# Altium PCB kapuas.PcbDoc
Units mm, origin at the board's own origin, x right, y up, seen from the top; angles counter-clockwise.
Board outline 100 x 100 mm, 2 copper layers (Top Layer, Bottom Layer); 70 components, 48 nets, 250 pads, 17 vias.
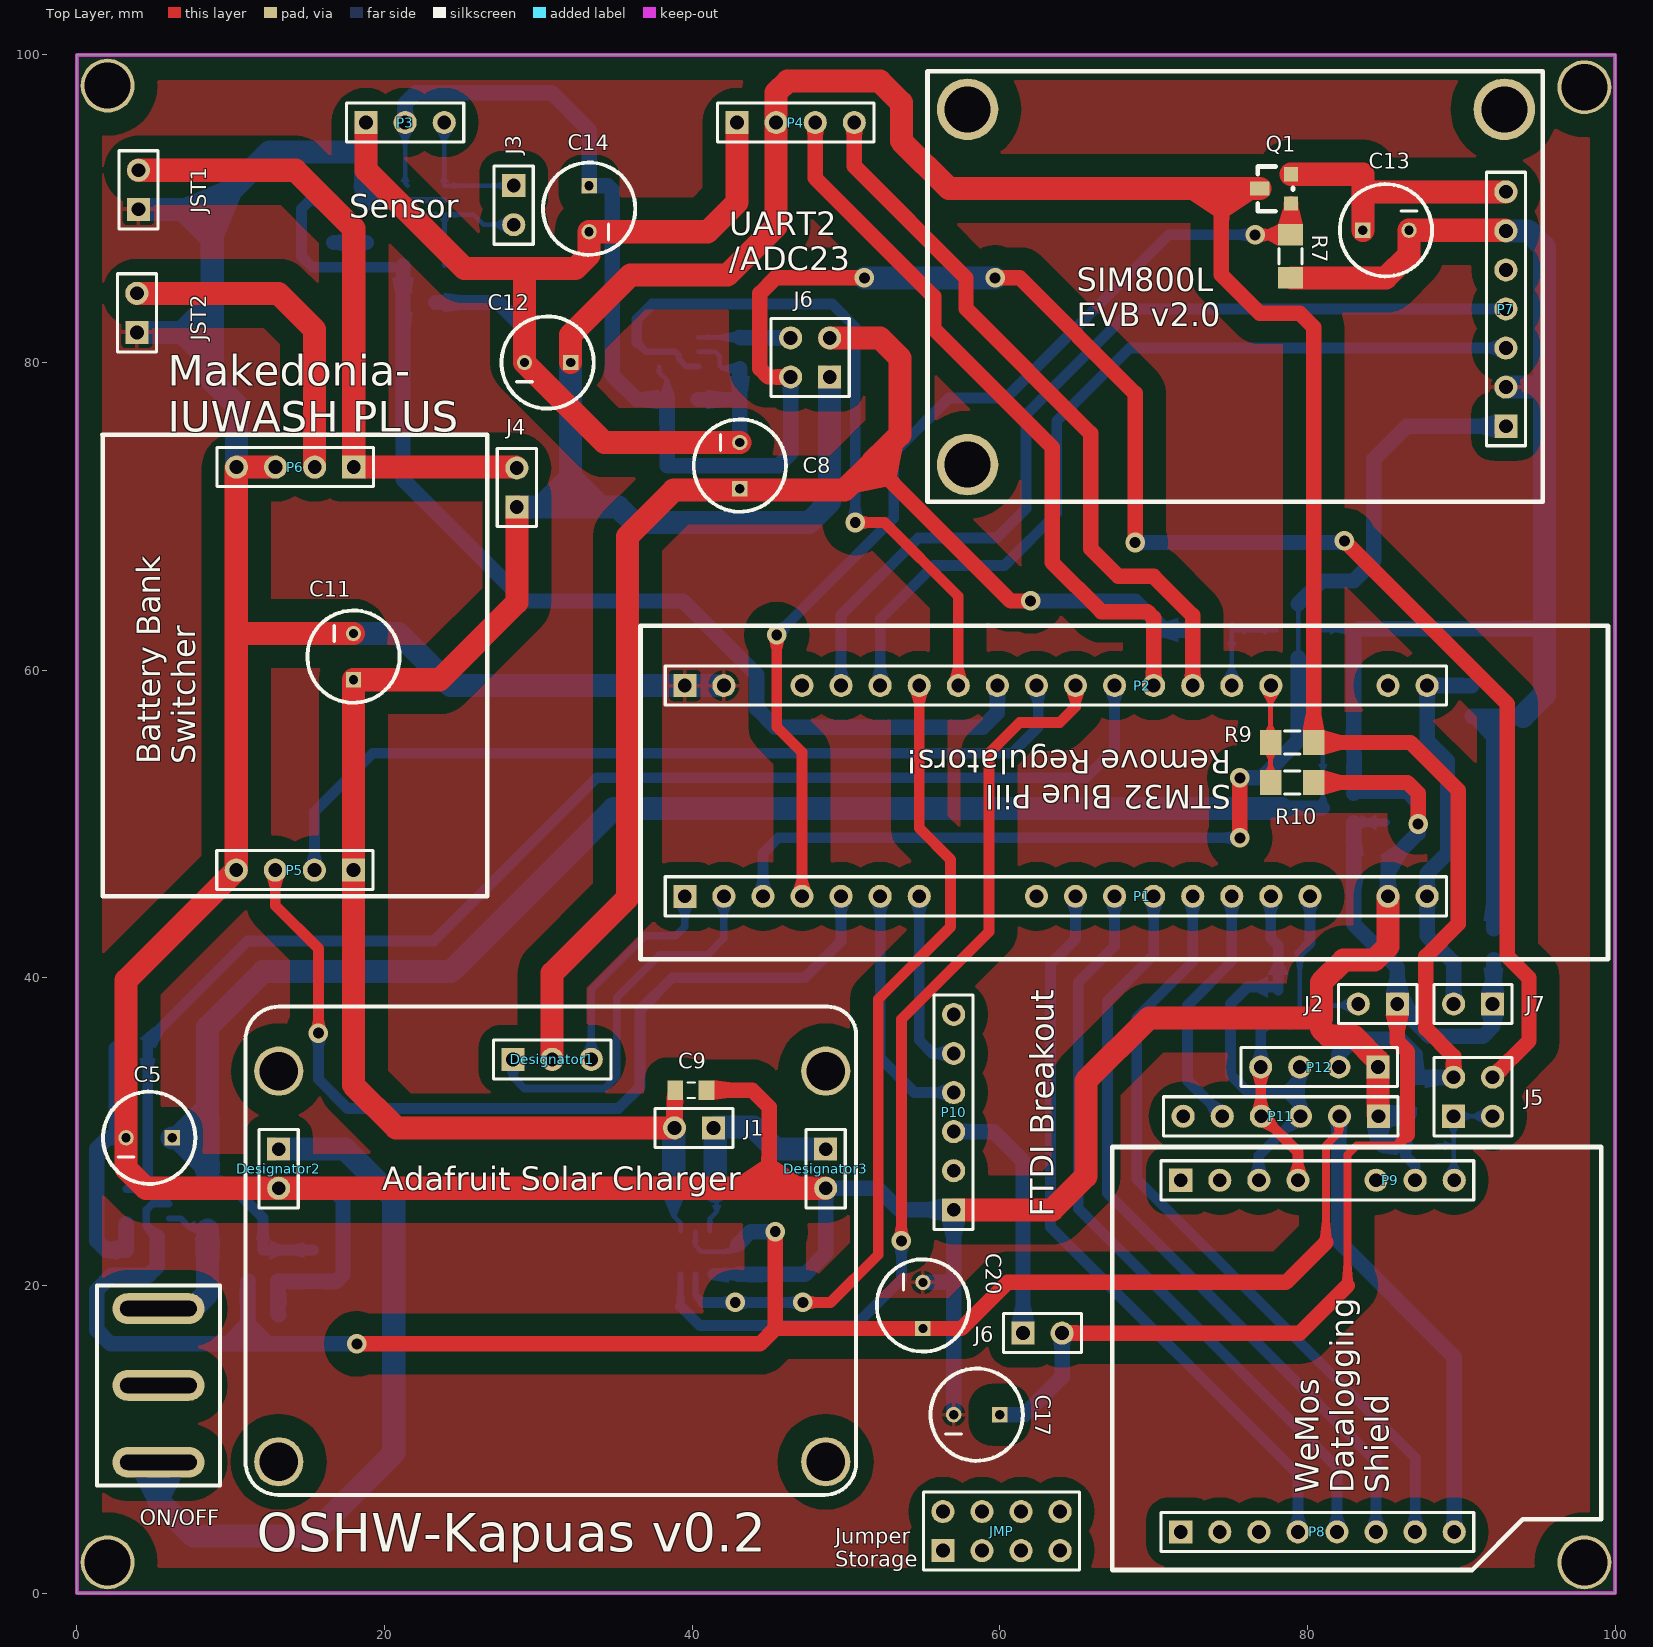
[diagram p0: Top Layer view]
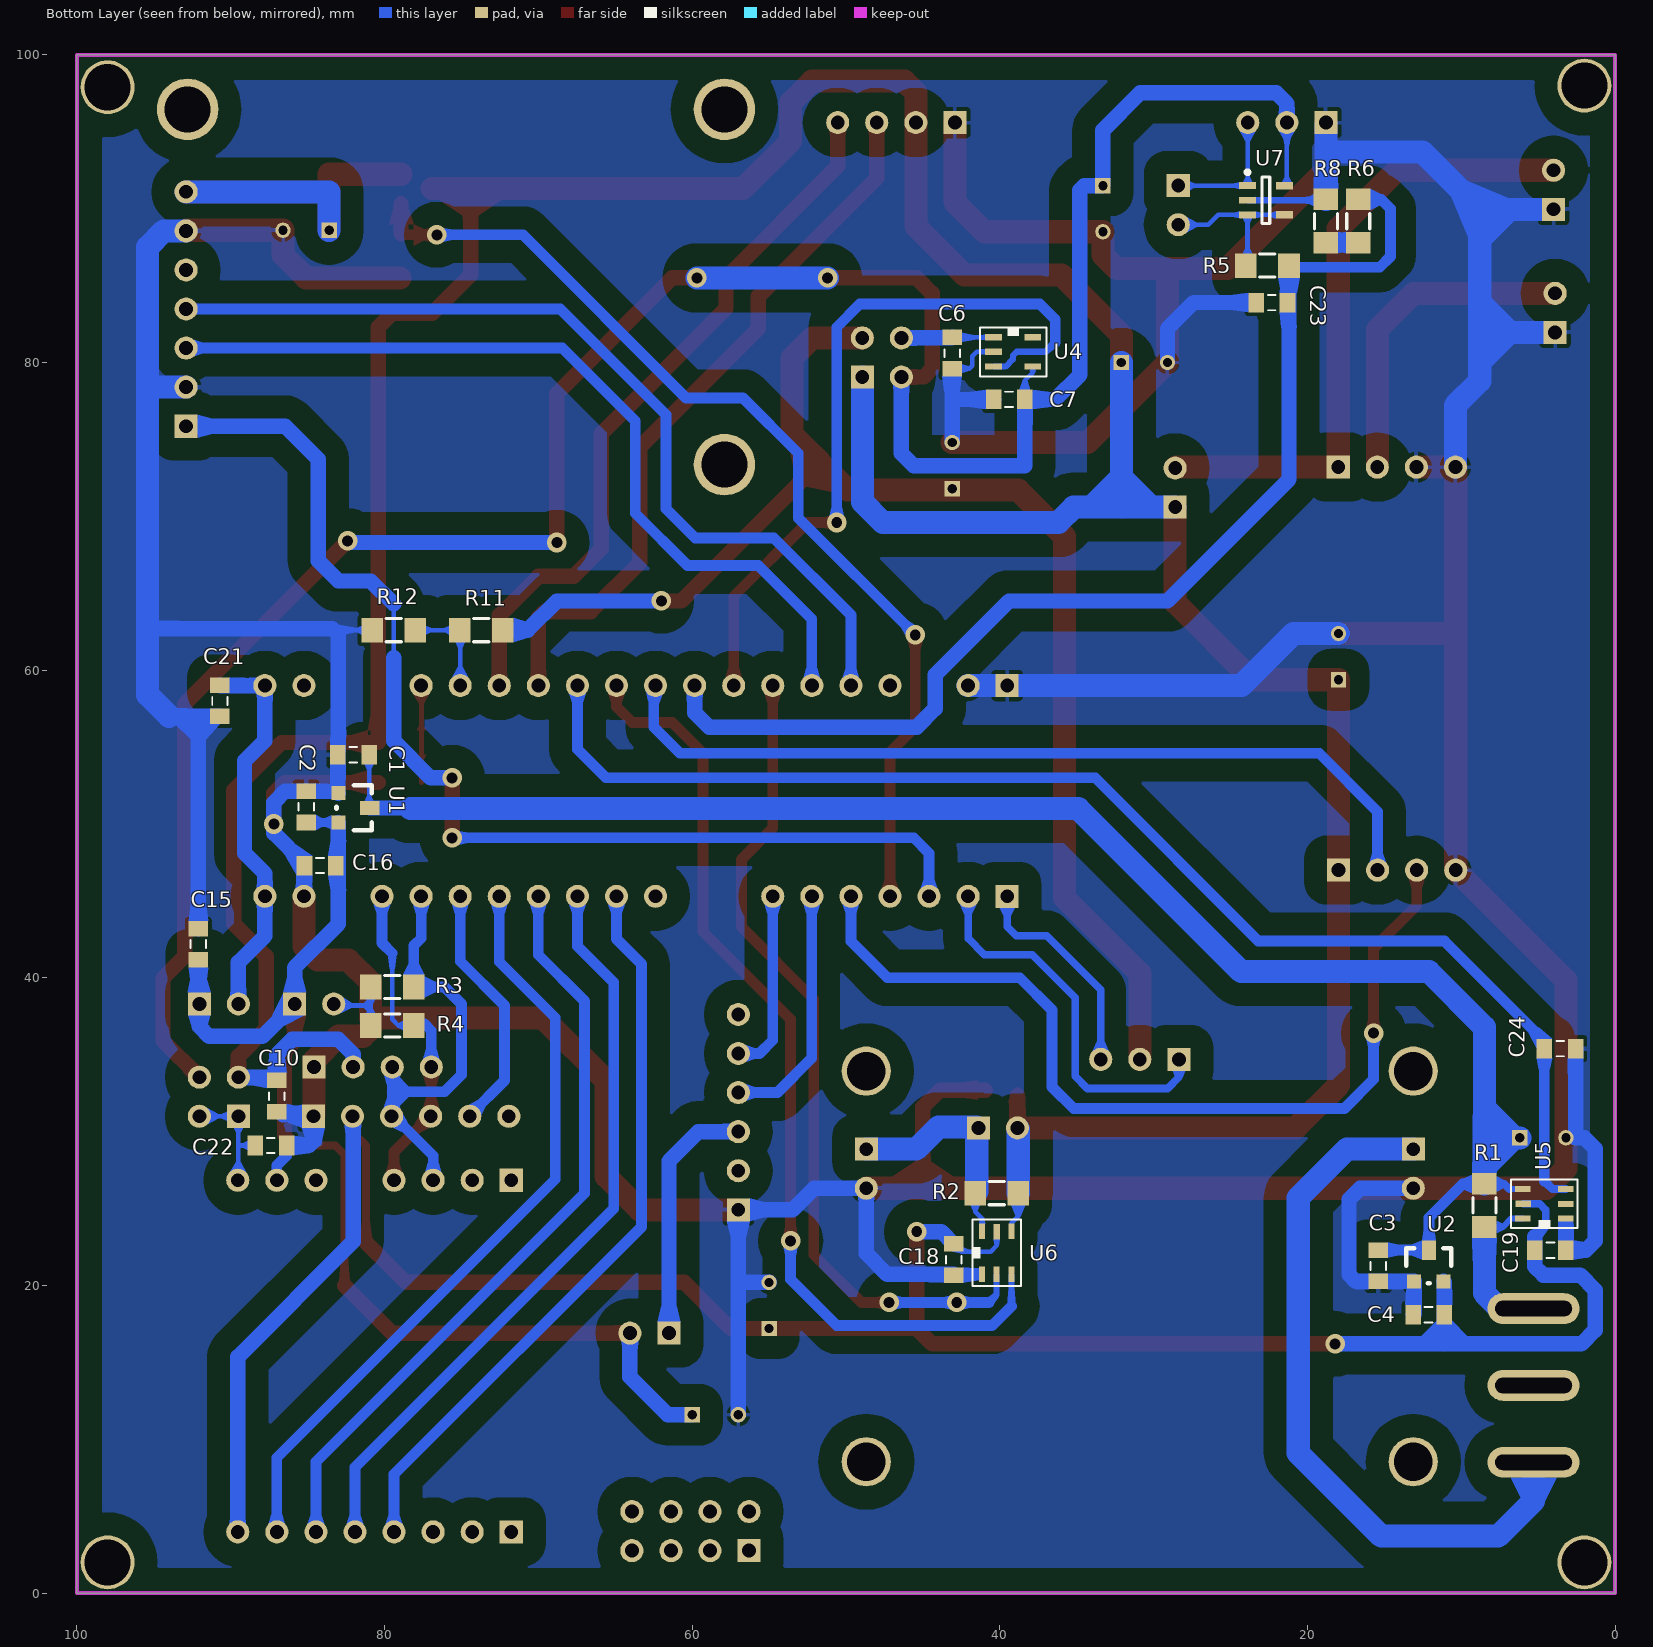
[diagram p1: Bottom Layer view, seen from below]

## Layer stack, top to bottom
Top Solder: solder mask 0.0102, Solder Resist, Dk 3.5
Top Layer: signal copper 0.0356
Dielectric 1: dielectric 0.32, FR-4, Dk 4.8
Bottom Layer: signal copper 0.0356
Bottom Solder: solder mask 0.0102, Solder Resist, Dk 3.5

## Board outline
0,0 100,0 100,100 0,100

## Design rules (kind name [scope] priority, off if disabled: settings)
Clearance [All] p1: gap=0.5 ignorepadtopadclearanceinfootprint=FALSE
PolygonConnect [All] p1: connectstyle=Relief reliefconductorwidth=0.254 reliefentries=4 polygonreliefangle="90 Angle" airgapwidth=0.254
RoutingVias [All] p1: holewidth=0.711 width=1.27 viastyle="Through Hole" minholewidth=0.711 minwidth=1.27 maxholewidth=0.711 maxwidth=1.27
SolderMaskExpansion [All] p1: expansion=0.102
Width [All] p1: maxlimit=1.5 minlimit=0.3 preferedwidth=0.3
30 further rules are at their usual default settings.

## Components (designator, comment, footprint, x,y, rotation, side; value= is the part's Value field where it differs from the comment)
C1 "1uF" 0805C 83.782,53.75 r180 bottom
C2 "1uF" 0805C 85.85,52.882 r270 bottom
C3 "1uF" 0805C 14.65,19.518 r90 bottom
C4 "1uF" 0805C 13.882,17.35 r180 bottom
C5 "470uF" RadCap6mmV 3.2,29.6 r0 top
C6 "1uF" 0805C 42.35,78.85 r90 bottom
C7 "1uF" 0805C 41.15,76.85 r180 bottom
C8 "4700uF" RadCap6mmV 43.1,74.8 r270 top
C9 "100n" 0805C 41.682,33.45 r180 top
C10 "100n" 0805C 86.25,30.55 r90 bottom
C11 "470uF" RadCap6mmV 17.98,62.38 r270 top
C12 "470uF" RadCap6mmV 29.1,80 r0 top
C13 "ElecCap" RadCap6mmV 86.6,88.6 r180 top
C14 "470uF" RadCap6mmV 33.3,88.5 r90 top
C15 "100n" 0805C 92.85,43.95 r270 bottom
C16 "100n" 0805C 85.95,46.55 r180 bottom
C17 "100uF" RadCap6mmV 57,11.6 r0 top
C18 "100n" 0805C 42.25,19.918 r90 bottom
C19 "100n" 0805C 2.45,23.05 r0 bottom
C20 "100uF" RadCap6mmV 55,20.2 r270 top
C21 "100n" 0805C 89.95,56.25 r90 bottom (schematic designator C15)
C22 "100n" 0805C 89.15,28.35 r180 bottom (schematic designator C15)
C23 "100n" 0805C 24.082,83.15 r180 bottom (schematic designator C16)
C24 "1uF" 0805C 1.818,36.15 r0 bottom (schematic designator C3)
Designator1 "Comment" HDR1x3 28.36,34.7 r0 top
Designator2 "Comment" HDR1x2 13.12,28.858 r270 top
Designator3 "Comment" HDR1x2 48.68,28.858 r270 top
J1 "Jumper" HDR1X2#1 41.5,30.2 r180 top
J2 "Jumper" HDR1X2#1 85.947,38.256 r180 top
J3 "Jumper" HDR1X2#1 28.444,91.607 r270 top
J4 "Jumper" HDR1X2#1 28.556,70.493 r90 top
J5 "Header 2X2" HDR2X2 89.5,31 r0 top
J6 "Header 2X2" HDR2X2 48.94,79.06 r90 top
J6 "Jumper" HDR1X2#1 61.4,16.944 r0 top
J7 "Jumper" HDR1X2#1 92.147,38.256 r180 top (schematic designator J2)
JMP "Header 2X2" HDR2X4 56.3,2.76 r0 top (schematic designator J5)
JST1 "" HDR1X2#2 4,89.96 r90 top
JST2 "" HDR1X2#2 3.9,81.96 r90 top
ON/OFF "Power SPDT Switch" SPDT-POW 5.3,13.5 r270 top (schematic designator S1)
P1 "Header 20" HDR1X20#1 39.52,45.3 r0 top
P2 "Header 20" HDR1X20#2 39.52,59 r0 top
P3 "" HDR1X3 18.8,95.6 r0 top
P4 "" HDR1X4 42.92,95.6 r0 top
P5 "" HDR1X4 17.98,47 r180 top
P6 "" HDR1X4 18,73.2 r180 top
P7 "Header 7" HDR1X7 92.9,75.86 r90 top
P8 "" HDR1X8#1 71.76,3.98 r0 top
P9 "" HDR1X8#2 71.76,26.84 r0 top
P10 "" HDR1X6 57,24.92 r90 top
P11 "Header 7" HDR1X6 84.62,31 r180 top (schematic designator P7)
P12 "Header 7" HDR1X4 84.58,34.2 r180 top (schematic designator P7)
Q1 "Si2302" "SOT-23 Si2302" 78.932,90.335 r90 top
R1 "0R1" RES1206S 8.5,25.2 r90 bottom
R2 "0R1" RES1206S 40.2,26 r180 bottom
R3 "10k" RES1206S 79.5,39.4 r0 bottom
R4 "10k" RES1206S 79.5,36.9 r0 bottom
R5 "10k" RES1206S 22.6,86.3 r0 bottom
R6 "10k" RES1206S 16.7,89.2 r90 bottom
R7 "10k" RES1206S 78.9,86.9 r90 top
R8 "10k" RES1206S 18.8,89.2 r270 bottom
R9 "33k" RES1206S 79,55.3 r0 top
R10 "33k" RES1206S 79,52.7 r180 top
R11 "33k" RES1206S 73.7,62.6 r180 bottom
R12 "10k" RES1206S 79.4,62.6 r180 bottom
U1 "XC6206" "SOT-23 XC6206" 83,52.005 r270 bottom
U2 "XC6206" "SOT-23 XC6206" 13.065,20.268 r180 bottom
U4 "LP2980" "SOT-23-5 LP2980" 41.3,79.04 r180 bottom
U5 "TS1101-50" SOT23-6 3.327,24.36 r0 bottom
U6 "TS1101-50" SOT23-6 41.15,20.848 r90 bottom
U7 "LMV321M5/NOPB" MF05A_N 22.7,90.55 r180 bottom

## Footprints (in the part's own frame and the unit in brackets; to place one, negate y for a bottom-side part, rotate by r counter-clockwise, add the part's x,y. Pads: shape width x height; smd on the part's side, far side on the other; paste and mask are expansions set on the pad)
0805C [mm] "Ceramic SMD Caps"
  rect 1.016x1.27 smd: 1(0.75,0.75) 2(2.782,0.75)
  silkscreen extent 1.5,0.25 2,1.25, body extent 0.72,0.11 2.78,1.38, height 0.66
HDR1x2 [mm] "Connector; Header; 2 Position"
  rect 1.5x1.5 hole 0.9: 1(0,0)
  round 1.5 hole 0.9: 2(2.54,0)
  silkscreen extent -1.27,-1.27 3.81,1.27
HDR1X2#1 [mm]
  rect 1.5x1.5 hole 0.9: 1(0.107,-0.044)
  round 1.5 hole 0.9: 2(2.647,-0.044)
  silkscreen extent -1.16,-1.31 3.92,1.23
HDR1X2#2 [mm] "Connector; Header; 2 Position"
  rect 1.5x1.5 hole 0.9: 1(0,0)
  round 1.5 hole 0.9: 2(2.54,0)
  silkscreen extent -1.27,-1.27 3.81,1.27
HDR1x3 [mm] "Connector; Header; 3 Position"
  rect 1.5x1.5 hole 0.9: 1(0,0)
  round 1.5 hole 0.9: 2(2.54,0) 3(5.08,0)
  silkscreen extent -1.27,-1.27 6.35,1.27
HDR1X3 [mm] "Connector; Header; 3 Position"
  rect 1.5x1.5 hole 0.9: 1(0,0)
  round 1.5 hole 0.9: 2(2.54,0) 3(5.08,0)
  silkscreen extent -1.27,-1.27 6.35,1.27
HDR1X4 [mm] "Connector; Header; 4 Position"
  rect 1.5x1.5 hole 0.9: 1(0,0)
  round 1.5 hole 0.9: 2(2.54,0) 3(5.08,0) 4(7.62,0)
  silkscreen extent -1.27,-1.27 8.89,1.27
HDR1X6 [mm] "Connector; Header; 6 Position"
  rect 1.5x1.5 hole 0.9: 1(0,0)
  round 1.5 hole 0.9: 2(2.54,0) 3(5.08,0) 4(7.62,0) 5(10.16,0) 6(12.7,0)
  silkscreen extent -1.27,-1.27 13.97,1.27
HDR1X7 [mm] "Connector; Header; 7 Position"
  rect 1.5x1.5 hole 0.9: 1(0,0)
  round 1.5 hole 0.9: 2(2.54,0) 3(5.08,0) 4(7.62,0) 5(10.16,0) 6(12.7,0) 7(15.24,0)
  silkscreen extent -1.27,-1.27 16.51,1.27
HDR1X8#1 [mm] "Connector; Header; 8 Position"
  rect 1.5x1.5 hole 0.9: 1(0,0)
  round 1.5 hole 0.9: 2(2.54,0) 3(5.08,0) 4(7.62,0) 5(10.16,0) 6(12.7,0) 7(15.24,0) 8(17.78,0)
  silkscreen extent -1.27,-1.27 19.05,1.27
HDR1X8#2 [mm] "Connector; Header; 8 Position"
  round 0 all layers, no hole mask+0: 0(27.24,0)
  rect 1.5x1.5 hole 0.9: 1(0,0)
  round 1.5 hole 0.9: 2(2.54,0) 3(5.08,0) 4(7.62,0) 6(12.7,0) 7(15.24,0) 8(17.78,0)
  silkscreen extent -1.27,-1.27 19.05,1.27
HDR1X20#1 [mm] "Connector; Header; 20 Position"
  rect 1.5x1.5 hole 0.9: 1(0,0)
  round 1.5 hole 0.9: 2(2.54,0) 3(5.08,0) 4(7.62,0) 5(10.16,0) 6(12.7,0) 7(15.24,0) 10(22.86,0) 11(25.4,0) 12(27.94,0) 13(30.48,0) 14(33.02,0) 15(35.56,0) 16(38.1,0) 17(40.64,0) 19(45.72,0) 20(48.26,0)
  round 0 all layers, no hole mask+0: 8(55.48,0) 9(57.48,0) 18(59.48,0)
  silkscreen extent -1.27,-1.27 49.53,1.27
HDR1X20#2 [mm] "Connector; Header; 20 Position"
  round 0 all layers, no hole mask+0: 0(57.48,0) 3(57.48,0) 18(59.48,0)
  rect 1.5x1.5 hole 0.9: 1(0,0)
  round 1.5 hole 0.9: 2(2.54,0) 4(7.62,0) 5(10.16,0) 6(12.7,0) 7(15.24,0) 8(17.78,0) 9(20.32,0) 10(22.86,0) 11(25.4,0) 12(27.94,0) 13(30.48,0) 14(33.02,0) 15(35.56,0) 16(38.1,0) 19(45.72,0) 20(48.26,0)
  silkscreen extent -1.27,-1.27 49.53,1.27
HDR2X2 [mm] "Connector; Header; 2x2 Position"
  rect 1.5x1.5 hole 0.9: 1(0,0)
  round 1.5 hole 0.9: 2(0,2.54) 3(2.54,0) 4(2.54,2.54)
  silkscreen extent -1.27,-1.27 3.81,3.81
HDR2X4 [mm] "Connector; Header; 4x2 Position"
  rect 1.5x1.5 hole 0.9: 1(0,0)
  round 1.5 hole 0.9: 2(0,2.54) 3(2.54,0) 4(2.54,2.54) 5(5.08,0) 6(5.08,2.54) 7(7.62,0) 8(7.62,2.54)
  silkscreen extent -1.27,-1.27 8.89,3.81
MF05A_N [mm] "SOT23, 5-Leads, Body 2.9x1.6mm, Pitch 0.95mm, Lead Span 2.8mm, IPC Medium Density"
  rect 1.1x0.45 smd: 1(-1.2,0.95) 2(-1.2,0) 3(-1.2,-0.95)
  rect 1.1x0.5 smd: 4(1.2,-0.95) 5(1.2,0.95)
  silkscreen extent -1.33,-1.5 0.25,1.95, body extent -0.83,-1.49 0.83,1.5, height 1.19
RadCap6mmV [mm] "470uF 10v Electrolytic Black SMG"
  rect 1x1 hole 0.6: 1(3,0)
  round 1 hole 0.6: 2(0,0)
  silkscreen extent -1.5,-3 4.5,3
RES1206S [mm] "Space Optimized 1206"
  rect 1.4x1.6 smd: 1(-1.4,0) 2(1.4,0)
  silkscreen extent -0.5,-0.75 0.5,0.75, body extent -1.69,-0.81 1.51,0.8, height 0.84
SOT23-6 [mil]
  rect 40x15.75 smd: 1(-5,0) 2(-5,-37) 3(-5,-75) 4(105,-75) 5(104.41,-37.4) 6(105,0)
  silkscreen extent -35,-100 135,25, body extent 2,-95 98,20, height 52
"SOT-23 Si2302" [mil] "Si2302 Logic Level MOSFET"
  rect 36x36 smd: 1(0,0) 3(75,0)
  rect 36x50 smd: 2(38,80)
  silkscreen extent -20,-5 95,85
"SOT-23 XC6206" [mil] "XC6206 SOT-23-3"
  rect 36x36 smd: 1(0,0) 2(75,0)
  rect 36x50 smd: 3(38,80)
  silkscreen extent -20,-5 95,85, body extent -20,-7 95,89, height 52
"SOT-23-5 LP2980" [mm] "LP2980 not-so-low IQ LDO"
  rect 1.1x0.4 smd: 1(0.9,2.6) 2(0.9,1.66) 3(0.9,0.695) 4(3.44,0.695) 5(3.44,2.6)
  silkscreen extent 0.01,0.06 4.33,3.24, body extent 0.95,0.19 3.39,3.11, height 1.33
SPDT-POW [mm] "SPDT I/O Power Switch"
  oval 2x6 hole 1 slot 5 at 90 deg: C(-5,0) NC(0,0) NO(5,0)
  silkscreen extent -6.5,-4 6.5,4

## Part data
C1 C2 C3 C4 C6 C7 C9 C10 C15 C16 C18 C19 C21 C22 C23 C24: library part SMD-CAP, "SMD Nonpolarized Ceramic Capacitor"
C5 C8 C11 C12 C13 C14 C17 C20: library part "Cap - Electrolytic", "Generic Thru-Hole Electrolytic Capacitor"
J1 J2 J3 J4 J6 J7: "Mini Jumpered Header"
J5 J6 JMP: "Header, 2-Pin, Dual row", LatestRevisionDate=17-Jul-2002, LatestRevisionNote="Re-released for DXP Platform.", Publisher="Altium Limited"
JST1 JST2: library part "Header 2", "Header, 2-Pin", LatestRevisionDate=17-Jul-2002, LatestRevisionNote="Re-released for DXP Platform.", Publisher="Altium Limited"
ON/OFF: library part "SPDT Power Switch"
P1 P2: "Header, 20-Pin", LatestRevisionDate=17-Jul-2002, LatestRevisionNote="Re-released for DXP Platform.", Publisher="Altium Limited"
P3: library part "Header 3", "Header, 3-Pin", LatestRevisionDate=17-Jul-2002, LatestRevisionNote="Re-released for DXP Platform.", Publisher="Altium Limited"
P4 P5 P6: library part "Header 4", "Header, 4-Pin", LatestRevisionDate=17-Jul-2002, LatestRevisionNote="Re-released for DXP Platform.", Publisher="Altium Limited"
P7 P11 P12: "Header, 7-Pin", LatestRevisionDate=17-Jul-2002, LatestRevisionNote="Re-released for DXP Platform.", Publisher="Altium Limited"
P8 P9: library part "Header 8", "Header, 8-Pin", LatestRevisionDate=17-Jul-2002, LatestRevisionNote="Re-released for DXP Platform.", Publisher="Altium Limited"
P10: library part "Header 6", "Header, 6-Pin", LatestRevisionDate=17-Jul-2002, LatestRevisionNote="Re-released for DXP Platform.", Publisher="Altium Limited"
Q1: "Si2302 Logic Level MOSFET"
R1 R2 R3 R4 R5 R6 R7 R8 R9 R10 R11 R12: library part SMD-RES, "SMD Resistor"
U1 U2: "200mA Low IQ LDO"
U4: "50mA Low IQ LDO w/ Enable"
U5 U6: library part TS1101, "ULP Bidirectional Current Sensor"
U7: "General Purpose, Low Voltage, Rail-to-Rail Output Operational Amplifiers, 5-pin SOT-23, Pb-Free", Manufacturer="National Semiconductor", PackageTopMarking=A13*XTT, PowerWise=N, ComponentLink1Description="Manufacturer URL", ComponentLink1URL=http://www.national.com/, ComponentLink2Description="LMV321 Datasheet", ComponentLink2URL=http://www.national.com/ds/LM/LMV321.pdf, ComponentLink3Description="LMV321 Web Page", ComponentLink3URL=http://www.national.com/pf/LM/LMV321.html, ComponentLink4Description="MF05A Package Page", ComponentLink4URL=http://www.national.com/packaging/folders/mf05a.html, CompType=Amplifiers, DatasheetVersion=Sep-2009, High-Reliability=Y, PackageDescription="Molded SOT-23, .115 x .063 x .040 in Body, 5 Lead, .0375 in Pitch", PackageReference=MF05A, PackageVersion="revD, Aug-2008", PartNumber=LMV321M5/NOPB, PinCount=5, RoHS=Y

## Free pads (board coordinates)
  round 3.5 hole 3: 0(2,2) 0(2,98) 0(98,2) 0(98,97.9)
  round 3.2 hole 2.5: 0(13.12,8.538) 0(13.12,33.938) 0(48.68,8.538) 0(48.68,33.938)
  round 4 hole 3: 0(57.9,73.36) 0(57.9,96.46) 0(92.8,96.46)

## Via types
v1: diameter 1.27, hole 0.711, Top Layer to Bottom Layer, 17 vias

## Nets (pads, with @x,y where several pads share a name; then routed paths per layer and width w, separated by ;. In a path a pad name is that pad's centre, name@x,y a point inside that pad or via, vN(x,y) a via of type N, cw(c..) or ccw(c..) an arc to the next point about the centre after c; other vN are vias at no path point)
3V3-R1: C2.2 C15.2 C16.2 C17.1 J2.1 J6.2@64.047,16.9 J7.1 U1.2 | length 76.2
  Top Layer w0.5: 82.6,20 82.6,28.5 83.2,29.1 85.8,29.1 86.5,29.8
  Top Layer w1: J6.2@64.047,16.9 79.5,16.9 82.6,20 ; J2.1 85.84,35.86 86.5,35.2 86.5,29.8
  Bottom Layer w0.3: J7.1 J7.1@92.1,38.36
  Bottom Layer w0.5: U1.2 C2.2
  Bottom Layer w1: C17.1 61.6,11.6 64.047,14.047 J6.2@64.047,16.9 ; U1.2 83,43.5 85.84,40.66 J2.1 87.94,36.2 91.4,36.2 92.04,36.84 J7.1 ; J7.1@92.1,38.36 C15.2
3V3-R2: C4.2 C18.2 C19.2 C20.1 P8.8 P11.2 U2.2 U5.5 U6.5 | length 151.9
  Top Layer w0.5: 81.2,22.8 81.2,29.1 82.04,29.94 P11.2@82.04,31.1
  Top Layer w1: v1(18.2,16.2) 44.4,16.2 45.4,17.2 ; v1(45.4,23.5) 45.4,17.2 ; 81.2,22.8 78.6,20.2 60.5,20.2 57.5,17.2 C20.1 45.4,17.2
  Bottom Layer w0.3: U6.5 40.2,22.6 40.6,22.2 42.5,22.2 C18.2
  Bottom Layer w0.5: 5.232,23.168 4.5,23.9 4.5,24.9 4.91,25.31 U5.5
  Bottom Layer w1: 5.232,23.168 C19.2 5.232,21.232 4.665,20.665 2.265,20.665 1.3,19.7 1.3,17.1 2.2,16.2 11.1,16.2 ; U2.2 11.1,20.208 C4.2 11.1,16.2 ; v1(18.2,16.2) 11.1,16.2 ; C18.2 43.8,23.5 v1(45.4,23.5) ; P11.2@82.04,31.1 82.04,22.86 89.54,15.36 P8.8
5V: C7.2 C14.1 J5.4 J6.2@46.4,79.06 P3.2 U4.4 U7.5 | length 159.3
  Top Layer w1: J6.2@46.4,79.06 44.94,79.06 44.4,79.6 44.4,84.5 45.4,85.5 v1(51.2,85.5) ; v1(59.7,85.5) 61.3,85.5 68.8,78 v1(68.8,68.3) ; v1(82.4,68.4) 93,57.8 93,41.4 94.4,40 94.4,35.9 J5.4
  Bottom Layer w0.3: P3.2 21.34,91.66 U7.5 ; U4.4 37.86,79.34 38.368,78.832 C7.2@38.368,77.8 ; v1@82.3,68.3 v1(82.4,68.4)
  Bottom Layer w1: P3.2 21.34,96.84 22.04,97.54 30.86,97.54 33.3,95.1 C14.1 34.5,91.5 34.8,91.2 34.8,79.2 36.4,77.6 C7.2 ; C7.2@38.368,77.8 38.368,73.3 45.6,73.3 46.4,74.1 J6.2@46.4,79.06 ; v1(68.8,68.3) v1@82.3,68.3
  Bottom Layer w1.5: v1(51.2,85.5) v1(59.7,85.5)
GND: C1.1 C2.1 C3.1 C4.1 C5.2 C6.1 C7.1 C8.2 C9.1 C10.1 C11.2 C12.2 C13.2 C14.2 C15.1 C16.1 C17.2 C18.1 C19.1 C20.2 C21.1 C22.2 C23.1 C24.1 Designator2.2 Designator3.2 JST1.1 JST2.1 P1.19 P2.1 P2.2 P3.1 P4.1 P5.4 P6.3 P6.4 P7.2 P7.6 P9.7 P10.1 P11.1 P12.1 R7.1 R8.1 R10.1 R12.1 U1.1 U2.1 U4.2 U5.1 U6.1 U7.2 | length 514
  Top Layer w0.3: 10.36,62.2 10.54,62.38 ; 29,86.1 29.1,86
  Top Layer w1: P6.4@10.36,73.18 P6.4 ; C9.1 43.9,32.7 45,31.6 45,26.318 ; R10.1 86.5,52.7 87.2,52 v1(87.2,50) ; P7.6@92.86,88.6 P7.6
  Top Layer w1.5: P6.4@10.36,73.18 10.36,62.2 P5.4 3.2,39.84 C5.2 3.2,27.6 4.482,26.318 Designator2.2 45,26.318 Designator3.2 ; P6.4 P6.3 ; 10.54,62.38 C11.2 ; P3.1 18.8,92.5 25.2,86.1 29,86.1 32.4,86.1 33.3,87 C14.2 41,88.5 42.92,90.42 P4.1 ; 29.1,86 C12.2 34.3,74.8 C8.2 ; P10.1 63.42,24.92 65.6,27.1 65.6,33.3 69.7,37.4 80.9,37.4 80.9,39.7 82.35,41.15 84.35,41.15 85.24,42.04 P1.19 ; R7.1@79,85.5 85.1,85.5 86.6,87 C13.2 P7.6@92.86,88.6 ; 80.9,36.7 81.4,36.2 83,36.2 84.58,34.62 P11.1@84.58,31.1
  Bottom Layer w0.3: 2.568,29.632 2.6,29.6 ; U4.2 41.5,80.7 41.8,80.4 41.8,79.8 42,79.6 C6.1 ; C18.1@42.947,20.721 C18.1 ; R12.1 83.3,62.6 83.4,62.7 ; C10.1@86.6,31.1 C10.1@87,31.5
  Bottom Layer w0.4: R8.1@18.85,90.55 U7.2
  Bottom Layer w0.7: C22.2 86.368,28.432 87,27.8 P9.7
  Bottom Layer w0.8: 41.4,20.721 C18.1@42.947,20.721
  Bottom Layer w1: 2.568,29.632 C24.1 ; 2.6,29.6 2,29.6 1.3,28.9 1.3,22.9 1.9,22.3 C19.1 3.2,24 ; Designator2.2 16.582,26.318 17.3,25.6 17.3,20.7 16.868,20.268 C3.1 U2.1 13.065,18.167 C4.1 ; R8.1 R8.1@18.85,90.55 ; P3.1@18.8,95.48 P3.1@18.92,95.6 ; C23.1 27.4,83.9 29.1,82.2 C12.2 ; C7.1 42.9,77.6 43.1,77.8 ; C18.1@43,20.721 47.321,20.721 48.68,22.08 Designator3.2 52.082,26.318 53.48,24.92 P10.1 57,20.1 ; C8.2 43.1,77.8 ; C6.1@43.1,79.6 43.1,77.8 ; C20.2 56.9,20.2 57,20.1 ; C17.2 57,20.1 ; U1.1 U1.1@83.032,52.037 ; C1.1@83,54.8 83,62.3 83.3,62.6 ; C1.1 U1.1@83.032,52.037 ; 83.4,62.7 95.4,62.7 ; P1.19 85.24,47.44 87.2,49.4 v1(87.2,50) 87.2,51.4 86.468,52.132 C2.1 83.127,52.132 U1.1@83.032,52.037 ; C22.2 84.9,29.1 84.58,29.42 84.58,31.1 C10.1@86.6,31.1 ; C21.1 92.1,57 ; C15.1 92.1,57 ; 94,57 92.1,57
  Bottom Layer w1.5: JST2.1 8.8,81.96 ; JST1.1 8.8,89.96 ; P6.4 10.38,77.22 8.8,78.8 8.8,81.96 ; C11.2 20.92,62.38 24.3,59 P2.1 P2.2 ; R8.1 18.8,93.7 ; P3.1@18.8,95.48 18.8,93.7 ; P7.2 95.4,78.4 ; P7.6 94.34,88.56 95.4,87.5 95.4,78.4 ; 94,57 95.4,58.4 95.4,62.7 95.4,78.4 ; 8.8,81.96 8.8,89.96 ; 8.8,89.96 12.54,93.7 18.8,93.7
Idd: C21.2 J7.2 P1.20 P2.20 | length 25.4
  Bottom Layer w1: J7.2 89.5,41 87.78,42.72 P1.20 87.78,46.78 89.1,48.1 89.1,54.1 87.78,55.42 P2.20 90.668,59 C21.2
INT: P1.15 P11.5 | length 16.3
  Bottom Layer w0.7: P11.5@74.42,31.1 72.2,33.32 72.2,38.2 75.08,41.08 P1.15
NetC1_2: C1.2 C3.2 C5.1 R1.2 U1.3 U2.3 U5.4 | length 106.9
  Bottom Layer w0.3: 78.3,51 78.34,51.04 ; U1.3 81,51.072 C1.2
  Bottom Layer w0.4: U5.4 6.865,26.265
  Bottom Layer w0.5: 6.865,26.265 7.2,26.6 R1.2
  Bottom Layer w0.7: R1.2 9.9,26.6 12.1,24.4 U2.3 C3.2
  Bottom Layer w1: 78.34,51.04 U1.3
  Bottom Layer w1.5: C5.1 8.5,29.6 ; R1.2 8.5,29.6 ; 78.3,51 34.9,51 24.3,40.4 12.1,40.4 8.5,36.8 8.5,29.6
NetC6_2: C6.2 J6.4 U4.1 | length 6
  Bottom Layer w0.3: U4.1 C6.2@43.1,81.64
  Bottom Layer w1: C6.2@43.1,81.64 43.14,81.6 J6.4
NetC13_1: C13.1 P7.7 Q1.3 | length 29.5
  Top Layer w0.3: 83.6,90.9 83.8,91.1
  Top Layer w1.5: Q1.3 83.6,92.24 83.6,90.9 C13.1 ; 83.8,91.1 P7.7
  Bottom Layer w1.5: C13.1 83.6,91.1 P7.7
NetJ1_1: Designator3.1 J1.1 R2.1 U6.6 | length 14.8
  Bottom Layer w0.3: U6.6 41.15,24.35 41.6,24.8 R2.1 R2.1@41.5,26.1
  Bottom Layer w1.5: R2.1@41.5,26.1 41.5,30.3 44,30.3 45.442,28.858 Designator3.1
NetJ2_2: J2.2 R3.2 R4.2 | length 4.9
  Bottom Layer w0.3: R4.2 80.9,38.2 ; R3.2 80.9,38.2 ; J2.2 83.2,38.2 80.9,38.2
NetJ3_1: J3.1 P3.3 U7.1 | length 8.7
  Bottom Layer w0.3: P3.3 23.88,91.52 U7.1 J3.1 J3.1@28.432,91.532
NetJ3_2: J3.2 R5.2 U7.3 U7.4 | length 10.5
  Bottom Layer w0.3: U7.4 U7.3 ; R5.2@23.9,86.3 U7.3 ; J3.2 26.44,88.96 25.8,89.6 U7.3
NetJ5_1: C22.1 J5.1 J5.3 P9.8 | length 7.9
  Bottom Layer w0.3: C22.1 89.4,29.1 89.5,29 ; P9.8 89.5,26.88 89.5,29 ; J5.3 J5.1 89.5,29
NetJ6_1: J6.1@61.507,16.9 P10.3 | length 16.5
  Bottom Layer w1: P10.3 59.6,30 61.507,28.093 J6.1@61.507,16.9
NetP1_1: Designator1.3 P1.1 | length 14.3
  Bottom Layer w0.5: Designator1.3 33.44,39.22 36.96,42.74 38.94,42.74 39.52,43.32 P1.1
NetP1_2: Designator1.1 P1.2 | length 24.9
  Bottom Layer w0.5: Designator1.1 28.36,33.54 29.1,32.8 34.3,32.8 35.1,33.6 35.1,38.7 37.9,41.5 41,41.5 42.06,42.56 P1.2
NetP1_3: P1.3 P7.1 | length 74
  Top Layer w1: v1(75.6,49.1) v1(75.6,53)
  Bottom Layer w0.3: 79.4,60.8 79.4,64.3
  Bottom Layer w0.7: P1.3 44.6,48.1 45.6,49.1 v1(75.6,49.1)
  Bottom Layer w1: v1(75.6,53) 77,53 79.4,55.4 79.4,60.8 ; 79.4,64.3 80.9,65.8 83,65.8 84.3,67.1 84.3,73.7 86.46,75.86 P7.1
NetP1_4: P1.4 Q1.1 R7.2 | length 66.4
  Top Layer w0.7: v1(45.5,62.3) 45.5,56.3 47.14,54.66 P1.4 ; v1(76.6,88.3) R7.2 ; R7.2@78.932,88.368 R7.2@79,88.3
  Top Layer w1: R7.2@78.932,88.368 Q1.1
  Bottom Layer w0.7: v1(45.5,62.3) 53.1,69.9 53.1,74.1 56.7,77.7 60.4,77.7 71,88.3 v1(76.6,88.3)
NetP1_5: P1.5 P5.3 | length 59.9
  Top Layer w0.7: P5.3 12.9,44.7 15.7,41.9 v1(15.7,36.4)
  Bottom Layer w0.7: v1(15.7,36.4) 15.7,33.4 17.6,31.5 35.2,31.5 36.6,32.9 36.6,37.9 38.7,40 47.3,40 49.68,42.38 P1.5
NetP1_6: P1.6 P10.4 | length 16.2
  Bottom Layer w0.7: P1.6 52.22,34.78 54.46,32.54 P10.4
NetP1_7: P1.7 P10.5 | length 12
  Bottom Layer w0.7: P1.7 54.76,35.94 55.62,35.08 P10.5
NetP1_10: P1.14 P8.7 | length 50.3
  Bottom Layer w0.7: P1.14 72.54,41.04 68.9,37.4 68.9,26.9 87,8.8 P8.7
NetP1_11: P1.11 P8.4 | length 48.7
  Bottom Layer w0.7: P1.11 64.92,42.52 63.3,40.9 63.3,23.8 79.38,7.72 P8.4
NetP1_12: P1.12 P8.5 | length 49.3
  Bottom Layer w0.7: P1.12 67.46,42.06 65.1,39.7 65.1,25 81.92,8.18 P8.5
NetP1_13: P1.13 P8.6 | length 49.8
  Bottom Layer w0.7: P1.13 70,41.5 67,38.5 67,26 84.46,8.54 P8.6
NetP1_16: P1.16 P9.3 P11.3 P12.3 R3.1 | length 28
  Bottom Layer w0.7: P9.3@76.75,26.93 P9.3 76.84,28.44 79.5,31.1 79.5,32.6 ; P1.16 77.62,42.58 78.1,42.1 R3.1 ; R3.1@78.1,39.2 R3.1 ; P12.3 79.5,32.6 ; R3.1 76.1,39.4 75,38.3 75,33.7 76.1,32.6 79.5,32.6
NetP1_17: P1.17 P9.4 P11.4 P12.4 R4.1 | length 21.3
  Top Layer w0.3: P11.4@76.96,31.1 P11.4@77.03,31.03
  Top Layer w0.7: P11.4@76.96,31.1 P12.4@76.96,34.3 ; P11.4@77.03,31.03 79.38,28.68 P9.4
  Bottom Layer w0.3: R4.1 79.1,36.9 79.5,37.3 79.5,41.6
  Bottom Layer w0.7: P12.4 76.96,36.56 77.4,37 ; 79.5,41.6 80.16,42.26 P1.17
NetP2_4: P2.4
NetP2_5: P2.5 P7.4 | length 59.6
  Bottom Layer w0.7: P2.5 49.68,63.58 54.7,68.6 59.8,68.6 61.7,70.5 61.7,76.6 68.58,83.48 P7.4
NetP2_6: P2.6 P7.3 | length 55.8
  Bottom Layer w0.7: P2.6 52.22,63.32 55.7,66.8 60.3,66.8 63.7,70.2 63.7,76.2 68.44,80.94 P7.3
NetP2_7: P2.7 U6.2 | length 54.5
  Top Layer w0.7: v1(47.2,18.9) 49,18.9 52.1,22 52.1,38.6 56.8,43.3 56.8,47.7 54.76,49.74 P2.7
  Bottom Layer w0.4: U6.2 40.21,19.39 40.7,18.9
  Bottom Layer w0.7: 40.7,18.9 v1(42.8,18.9) v1(47.2,18.9)
NetP2_8: P2.8 U4.3 | length 48.7
  Top Layer w0.7: v1(50.6,69.6) 52.5,69.6 57.3,64.8 P2.8
  Bottom Layer w0.4: 36.4,81.3 37,80.7 38.9,80.7 39.15,80.45 39.15,80.21 39.625,79.735 U4.3
  Bottom Layer w0.7: 36.4,81.3 36.4,82.8 37.4,83.8 49.1,83.8 50.6,82.3 v1(50.6,69.6)
NetP2_9: P2.10 P5.2 | length 56.1
  Bottom Layer w0.7: P5.2 15.44,50.8 19.24,54.6 60.8,54.6 62.5,56.3 P2.10@62.5,59.3
NetP2_10: C23.2 P2.9 R5.1 R6.2 | length 74.3
  Bottom Layer w0.7: R6.2 15.2,90.6 14.6,90 14.6,86.9 15.3,86.2 20.5,86.2
  Bottom Layer w1: R5.1 21.2,72.4 29.1,64.5 39.4,64.5 44.2,59.7 44.2,57.5 45.4,56.3 58.9,56.3 59.84,57.24 P2.9
NetP2_11: P2.11 U6.3 | length 62.9
  Top Layer w0.7: v1(53.6,22.9) 53.6,35.6 ; 53.6,35.7 53.6,37.3 59.3,43 59.3,54.6 61.3,56.6 63.9,56.6 64.92,57.62 P2.11
  Bottom Layer w0.4: 39.245,18.655 U6.3
  Bottom Layer w0.7: 39.245,18.655 40.5,17.4 50.6,17.4 53.6,20.4 v1(53.6,22.9)
NetP2_12: C24.2 P2.12 U5.3 | length 85.6
  Bottom Layer w0.5: U5.3 4.065,26.265 4.6,26.8
  Bottom Layer w0.7: 4.6,26.8 C24.2 4.6,35.9 11.1,42.4 23.2,42.4 33.8,53 65.6,53 67.46,54.86 P2.12
NetP2_13: P2.13 P4.3 | length 47.5
  Top Layer w1: P4.3 48,92 55.7,84.3 55.7,82.2 63.4,74.5 63.4,67 66.6,63.8 69.6,63.8 70,63.4 P2.13
NetP2_14: P2.14 P4.4 | length 47.1
  Top Layer w1: P4.4 50.54,92.76 57.8,85.5 57.8,83.5 65.9,75.4 65.9,67.9 67.7,66.1 70,66.1 72.54,63.56 P2.14
NetP2_15: P2.15 R11.1 R12.2 | length 6.9
  Bottom Layer w0.3: P2.15 75.08,62.98 R11.1@75.1,63 ; R11.1 R12.2
NetP2_16: P2.16 R9.1 R10.2 | length 6.3
  Top Layer w0.3: R10.2 R9.1 77.6,58.98 P2.16
NetR1_1: ON/OFF.C R1.1 U5.6 | length 10.3
  Bottom Layer w0.4: U5.6 6.74,24.36 7.3,23.8 R1.1@8.3,23.8
  Bottom Layer w1.5: ON/OFF.C 7.5,18.5 8.5,19.5 R1.1@8.5,23.6
NetR6_1: R6.1 R8.2 | length 2.1
  Bottom Layer w1: R6.1 R8.2
NetS1_NO: Designator2.1 ON/OFF.NO | length 46.4
  Bottom Layer w1.5: ON/OFF.NO 5.3,6 7.6,3.7 15.2,3.7 20.6,9.1 20.6,25.7 17.442,28.858 Designator2.1
VBAT: C9.2 C10.2 C11.1 C12.1 J1.2 J4.1 J5.2 J6.1@48.94,79.06 P4.2 P5.1 P12.2 Q1.2 R2.2 R9.2 U6.4 | length 260.2
  Top Layer w0.3: C9.2@38.853,32.385 C9.2@39.068,32.6
  Top Layer w1: J1.2 C9.2@38.853,32.385 ; 74.4,91.3 74.4,85.7 76.9,83.2 79.5,83.2 80.4,82.3 R9.2 86.7,55.3 89.8,52.2 89.8,43.5 87.7,41.4 87.7,36.7 89.5,34.9 J5.2
  Top Layer w1.5: J4.1 28.6,64.4 23.58,59.38 C11.1 P5.1 17.98,33.02 20.756,30.244 J1.2 ; C12.1 32.1,81.8 36,85.7 42.3,85.7 45.46,88.86 P4.2 45.46,97.56 46.2,98.3 52.2,98.3 53.6,96.9 53.6,94.4 56.7,91.3 74.4,91.3 Q1.2
  Bottom Layer w0.3: R2.2 38.8,24.5 39.245,24.055 U6.4 ; J1.2@38.8,30.14 J1.2@38.96,30.3 ; C10.2 C10.2@87,33.532 ; J5.2@89.492,33.532 J5.2
  Bottom Layer w1: P12.2 82.04,35.04 83,36 86,36 87,35 87,33.532 J5.2@89.492,33.532
  Bottom Layer w1.5: J4.1 32.1,70.6 ; C12.1 32.1,70.6 ; R2.2 J1.2@38.8,30.14 ; J6.1@48.94,79.06 48.94,70.94 47.6,69.6 36.2,69.6 35.2,70.6 32.1,70.6
VBAT1: J4.2 JST1.2 P6.1 | length 41.7
  Top Layer w1.5: JST1.2 14.2,92.5 18,88.7 P6.1 J4.2@28.54,73.2
  Bottom Layer w0.3: J4.2@28.54,73.2 J4.2
VBAT2: JST2.2 P6.2 | length 21.5
  Top Layer w1.5: JST2.2 13.1,84.5 15.46,82.14 P6.2
VIN: C8.1 Designator1.2 J6.3 R11.2 | length 91.7
  Top Layer w1: 51.7,73.5 60.7,64.5 v1(62,64.5)
  Top Layer w1.5: Designator1.2 30.9,40.3 35.8,45.2 35.8,68.7 38.8,71.7 49.9,71.7 51.7,73.5 53.5,75.3 53.5,80.3 52.2,81.6 J6.3
  Bottom Layer w1: v1(62,64.5) 68.8,64.5 70.7,62.6 R11.2
pads on no net: JMP.1 JMP.2 JMP.3 JMP.4 JMP.5 JMP.6 JMP.7 JMP.8 ON/OFF.NC P1.8 P1.9 P1.10 P1.18 P2.0 P2.3 P2.18 P2.19 P7.5 P8.1 P8.2 P8.3 P9.0 P9.1 P9.2 P9.6 P10.2 P10.6 P11.6 U4.5 U5.2

## Polygon pours and split planes (outlines as drawn)
GND on Top Layer "Top" (solid, pour order 2): 0,0 100,0 100,100 0,100
GND on Bottom Layer "Bot" (solid, pour order 0): 0,0 100,0 100,100 0,100

## Keep-outs
Keep-Out Layer:
  the board outline again, w0.254

## Silkscreen, mask and mechanical layers (free items; w line width, h text height)
Top Overlay:
  lines w0.254: 50.661,36.224 50.661,8.448 cw(c48.592,8.448) 48.592,6.379 13.111,6.379 cw(c13.111,8.529) 10.961,8.529 10.961,35.961 cw(c13.129,35.961) 13.129,38.129 48.799,38.129 cw(c48.799,36.267) 50.661,36.267
  lines w0.3: 95.3,70.94 55.3,70.94 55.3,98.94 95.3,98.94 95.3,70.96 ; 1.657,75.3 1.68,75.277 1.68,45.3 26.68,45.3 26.68,75.3 1.657,75.3 ; 36.64,41.2 99.54,41.2 99.54,62.9 36.64,62.9 36.64,41.2 ; 67.3,1.5 67.3,29 99.1,29 99.1,4.8 94,4.8 90.7,1.5 67.3,1.5
  text "Sensor" at 17.7,89.4 h1.52
  text "UART2 / /ADC23" at 42.4,86 h1.52
  text "SIM800L / EVB v2.0" at 65,82.36 h1.52
  text "Makedonia- / IUWASH PLUS" at 5.9,75.5 h2
  text "STM32 Blue Pill / Remove Regulators!" at 75.04,54.8 h1.52 r180
  text "Battery Bank / Switcher" at 7.7,53.9 h1.52 r90
  text "Adafruit Solar Charger" at 19.851,26.191 h1.52
  text "FTDI Breakout" at 63.5,24.46 h1.52 r90
  text "WeMos / Datalogging  / Shield" at 85.3,6.5 h1.52 r90
  text "OSHW-Kapuas v0.2" at 11.7,2.7 h2.5
  text "Jumper / Storage" at 49.3,1.7 h1

## Dimensions
10.38,73.2 to 10.36,47 on Mechanical 13